# Altium PCB PCB1.PcbDoc (part 2 of 2)
Units mil, origin at the board's own origin, x right, y up, seen from the top; angles counter-clockwise.
Board outline 5600 x 3600 mil, 4 copper layers (Top Layer (GND), Layer 1 (Supplies), Layer 2 (GNDs), Bottom Layer (5VA)), stack 23.756 mil thick; 77 components, 77 nets, 439 pads, 79 vias.
Unrouted connection lines stored in the file: 2.
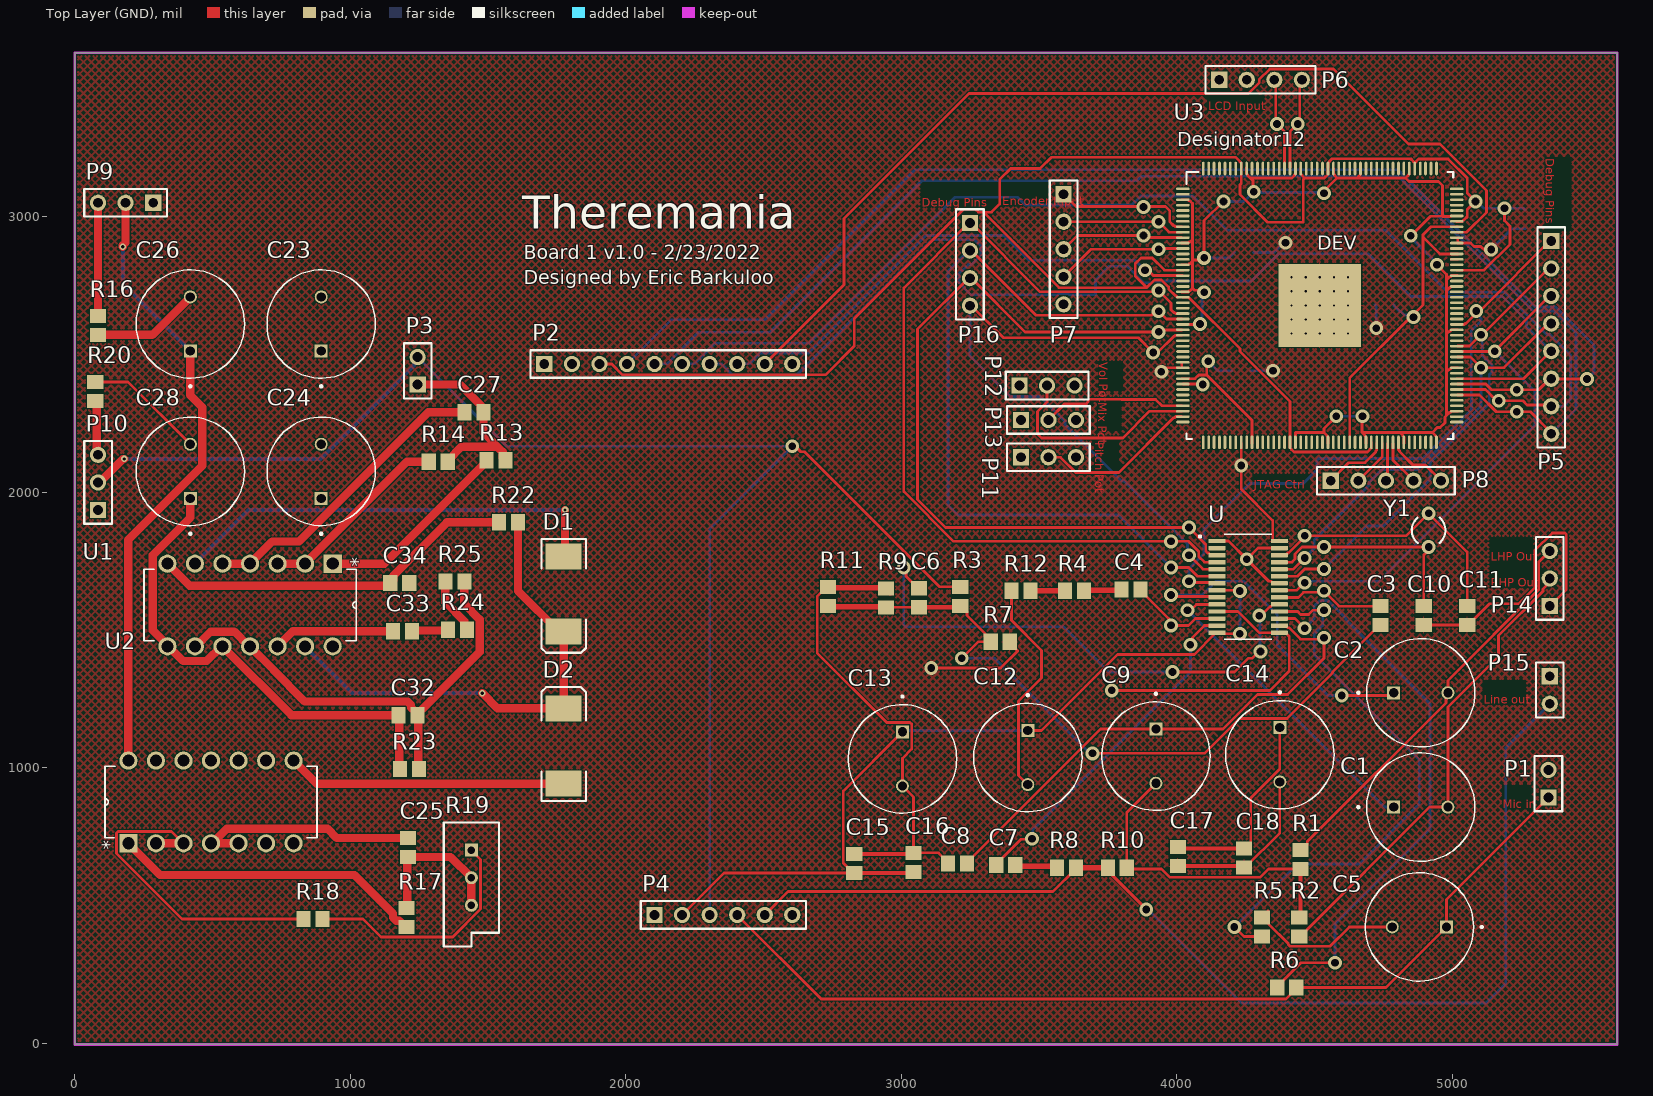
[diagram p0: Top Layer (GND) view]

## Polygon pours and split planes (outlines as drawn) (continued)
GND on Layer 2 (GNDs) (split plane): 5579.9,15.1 20.1,15.1 20.1,99.8 1050,99.8 1051.95,100.19 1053.58,101.28 2674.84,101.28 2676.79,101.67 2678.45,102.77 2679.55,104.43 2679.94,106.38 2679.94,761.28 4124.84,761.28 4126.79,761.67 4128.45,762.77 4129.55,764.43 4129.94,766.38 4129.94,1286.38 4129.55,1288.33 4128.45,1289.98 4126.79,1291.09 4124.84,1291.48 3829.94,1291.48 3829.94,1966.38 3829.94,2521.38 3829.55,2523.33 3828.45,2524.98 3826.79,2526.09 3824.84,2526.48 3199.84,2526.48 3197.89,2526.09 3196.24,2524.98 3195.13,2523.33 3194.74,2521.38 3194.74,1966.38 3194.74,1293.49 3190.78,1289.53 2676.89,1289.53 2676.89,2338.21 2676.5,2340.16 2675.4,2341.81 2673.6,2343.6 2671.95,2344.71 2670,2345.1 1605.1,2345.1 1605.1,3300 1604.71,3301.95 1603.6,3303.6 1597.21,3310 1595.56,3311.11 1593.6,3311.49 20.1,3311.49 20.1,3574.9 5579.9,3574.9

## Keep-outs
Keep-Out Layer:
  lines w10: 0,-5 0,85 0,3550 0,3595 5600,3595 5600,-5 0,-5

## Other copper
Top Layer (GND):
  text "LCD Input" at 4114.84,3386.38 h30
  text "Debug Pins" at 5339.84,3211.38 h30 r270
  text "Encoder Input" at 3367.88,3041.38 h30
  text "Debug Pins" at 3074.84,3036.38 h30
  text "Vol Pot" at 3719.84,2471.49 h30 r270
  text "Mix Pot" at 3714.84,2326.49 h30 r270
  text "Pitch Pot" at 3704.84,2181.49 h30 r270
  text "JTAG Ctrl" at 4279.84,2011.38 h30
  text "LHP Out" at 5139.73,1751.38 h30
  text "RHP Out" at 5139.73,1656.38 h30
  text "Line out" at 5114.73,1231.38 h30
  text "Mic in" at 5184.73,851.38 h30
Layer 1 (Supplies) (plane layer: these items are gaps in the copper):
  lines w10: 0,65 0,3320 ; 0,110 0.64,109.36 1050.64,109.36 ; 10,3310 0,3320 ; 1054.27,105.73 2674.84,105.73 2674.84,816.38 2759.84,816.38 4159.84,816.38 4159.84,1266.38 3824.84,1266.38 3824.84,1966.38 3824.84,2521.38 3199.84,2521.38 3199.84,1966.38 3199.84,1266.38 2764.94,1266.38 ; 2759.84,1266.38 2674.84,1266.38 2674.84,2339.84 2674.68,2340 1600,2340 1600,3300 1580,3320 0,3320
Layer 2 (GNDs) (plane layer: these items are gaps in the copper):
  lines w10: 0,110 0,3310 ; 3.62,106.38 2674.84,106.38 2674.84,766.38 2739.84,766.38 4124.84,766.38 4124.84,1286.38 3829.84,1286.38 3824.84,1281.38 3824.84,1966.38 3824.84,2521.38 3199.84,2521.38 3199.84,1966.38 3199.84,1291.38 3192.89,1284.43 2735.13,1284.43 2671.79,1284.43 2671.79,2338.21 2670,2340 1600,2340 1600,3300 1593.6,3306.4 1046.4,3306.4 3.6,3306.4 ; 5.1,104.9 1050,104.9 ; 2691.79,2948.23 2694.84,2951.28

## Silkscreen, mask and mechanical layers (free items; w line width, h text height)
Top Overlay:
  text "Theremania" at 1625,2955 h120
  text "Board 1 v1.0 - 2/23/2022" at 1630,2845 h50
  text "Designed by Eric Barkuloo" at 1630,2755 h50

## Text inside footprints (layer, text, board x,y; h text height)
U1: Top Overlay "*" at 980.73,1763 h50 r270; Mechanical 13 "*" at 980.73,1763 h50 r270
U2: Top Overlay "*" at 151,702 h50 r90; Mechanical 13 "*" at 151,702 h50 r90
U3: Top Overlay "DEV" at 4510,2880 h50; Top Overlay "Designator12" at 4003,3254.36 h50